# EAGLE board CT_schematic (EAGLE 7.6.0)

Size 100 x 80 mm. Coordinates in mm from the lower left corner, seen from the top.
Outline: 0,0 100,0 100,80 0,80 0,0
Copper layers (1*16): Top 0.035mm / dielectric 1.5mm / Bottom 0.035mm
Design rules "default": minimum track width 10mil, minimum drill 24mil, track to track 8mil, track to pad 8mil, pad to pad 8mil, via to via 8mil, smd to smd 8mil, copper to edge 40mil, drill to drill 8mil, minimum pad ring 10mil, minimum via ring 8mil, stop-mask expansion 4mil, vias tented up to drill 0mil, thermal gap 10mil

## Footprints (pad centres in the part's own frame; a part is rotated, then mirrored left to right if it is on the bottom)
C0603 = smd 0.8 x 0.8: 1 -0.762,0; 2 0.762,0
C0402 = smd 0.5 x 0.5: 1 -0.508,0; 2 0.508,0
C1210 = smd 1.2 x 2.5: 1 -1.524,0; 2 1.524,0
C1206 = smd 1.3 x 1.6: 1 -1.524,0; 2 1.524,0
L0603 = smd 0.8 x 0.8: 1 -0.762,0; 2 0.762,0
R0603 = smd 0.8 x 0.8: 1 -0.762,0; 2 0.762,0
UFQFPN20 = smd 0.35 x 0.3: 1 0.1,0; 5 0.1,2; 11 -2.7,2; 15 -2.7,0 | smd 0.7 x 0.3: 2 0,0.5; 3 0,1; 4 0,1.5; 12 -2.6,1.5; 13 -2.6,1; 14 -2.6,0.5 | smd 0.3 x 0.35: 6 -0.3,2.4; 10 -2.3,2.4; 16 -2.3,-0.4; 20 -0.3,-0.45 | smd 0.3 x 0.7: 7 -0.8,2.3; 17 -1.8,-0.3; 18 -1.3,-0.3; 19 -0.8,-0.3 | smd 0.3 x 0.8: 8 -1.3,2.3; 9 -1.8,2.3
SOIC-8 = smd 1.6 x 0.6: 1 -2.7,1.905 | smd 1.55 x 0.6: 2 -2.7,0.635; 3 -2.7,-0.635; 4 -2.7,-1.905; 5 2.7,-1.905; 6 2.7,-0.635; 7 2.7,0.635; 8 2.7,1.905
LGA14R35P5X6_200X200X100 = smd 0.35 x 0.15: 1 -0.8,0.525; 2 -0.8,0.175; 3 -0.8,-0.175; 4 -0.8,-0.525; 8 0.8,-0.525; 9 0.8,-0.175; 10 0.8,0.175; 11 0.8,0.525 | smd 0.15 x 0.35: 5 -0.35,-0.8; 6 0,-0.8; 7 0.35,-0.8; 12 0.35,0.8; 13 0,0.8; 14 -0.35,0.8
ASEK = smd 1.4 x 1: 1 -1.1,-0.8; 2 1.1,-0.8; 3 1.1,0.8; 4 -1.1,0.8
ASFL1 = smd 1.7 x 1.5: 1 -1.27,-1.1; 2 1.27,-1.1; 3 1.27,1.1; 4 -1.27,1.1
SOIC-8_EP = smd 1.6 x 0.533: 1 -2.921,1.905; 2 -2.921,0.635; 3 -2.921,-0.635; 4 -2.921,-1.905; 5 2.921,-1.905; 6 2.921,-0.635; 7 2.921,0.635; 8 2.921,1.905 | smd 2.54 x 3.302: EPAD 0,0 | drill 0.406 pad 0.406: P$1 -0.508,0.635; P$2 0.381,0.635; P$3 -0.508,-0.635; P$4 0.381,-0.635
DFN8_2X3MC = smd 0.813 x 0.305: 1 -1.398,0.75; 2 -1.398,0.25; 3 -1.398,-0.25; 4 -1.398,-0.75; 5 1.398,-0.75; 6 1.398,-0.25; 7 1.398,0.25; 8 1.398,0.75 | smd 1.753 x 1.549: 9 0,0
JST-2-SMD = smd 1 x 4.6: 1 -1,-3.7; 2 1,-3.7 | smd 1.6 x 3.4: NC1 -3.4,1.5; NC2 3.4,1.5
FCI_10118193-0001LF = smd 0.4 x 1.35: 1 -1.3,2.675; 2 -0.65,2.675; 3 0,2.675; 4 0.65,2.675; 5 1.3,2.675 | smd 1.6 x 1.4: 6 -3.2,2.45; 7 3.2,2.45 | smd 1.9 x 1.9: 8 -1.2,0; 9 1.2,0 | hole 0.5: -3.3,0; 3.3,0
SON-6 = smd 0.55 x 0.3: 1 -0.355,0.5 | smd 0.52 x 0.3: 2 -0.37,0; 3 -0.37,-0.5; 4 0.37,-0.5; 5 0.37,0; 6 0.37,0.5
SW_4-1437565-2 = smd 1.4 x 2.1: 1 -2.23,4.55; 2 -2.23,-4.55; 3 2.23,4.55; 4 2.23,-4.55
LGM67K-G1J2-24-Z = smd 0.8 x 1.4: A -2,0; C 0,0
NC7SZ125M5X = smd 1.3 x 0.7: 1 -1.3,0.95; 2 -1.3,0; 3 -1.3,-0.95; 4 1.3,-0.95; 5 1.3,0.95

## Placement (x,y rotation side)
C1  1e-07  [C0603]  -53.34,45.72 0 top  (outside the outline)
C2  1e-07  [C0603]  -57.15,45.72 0 top  (outside the outline)
C3  1e-07  [C0603]  -15.24,50.8 0 top  (outside the outline)
C4  1e-07  [C0603]  -19.05,50.8 0 top  (outside the outline)
C5  4.7e-06  [C0603]  -49.53,45.72 0 top  (outside the outline)
C6  1e-08  [C0603]  -22.86,50.8 0 top  (outside the outline)
C7  1e-06  [C0603]  -26.67,50.8 0 top  (outside the outline)
C8  1e-08  [C0402]  -19.05,55.88 0 top  (outside the outline)
C9  1e-07  [C0402]  -22.86,55.88 0 top  (outside the outline)
C10  1e-07  [C0402]  -26.67,55.88 0 top  (outside the outline)
C11  1e-08  [C0402]  -30.48,55.88 0 top  (outside the outline)
C12  1e-08  [C0402]  -34.29,55.88 0 top  (outside the outline)
C13  1e-05  [C1210]  -38.1,34.29 0 top  (outside the outline)
C14  1e-05  [C1210]  -44.45,34.29 0 top  (outside the outline)
C15  1e-05  [C1210]  -50.8,34.29 0 top  (outside the outline)
C16  1e-05  [C1210]  -57.15,34.29 0 top  (outside the outline)
C17  1e-07  [C0402]  -38.1,55.88 0 top  (outside the outline)
C18  1e-05  [C1206]  -16.51,40.64 0 top  (outside the outline)
C19  1e-05  [C1206]  -22.86,40.64 0 top  (outside the outline)
C20  1e-08  [C0402]  -41.91,55.88 0 top  (outside the outline)
F1  240.0  [L0603]  -30.48,50.8 0 top  (outside the outline)
R1  10000.0  [R0603]  -53.34,40.64 0 top  (outside the outline)
R2  1000.0  [R0603]  -34.29,50.8 0 top  (outside the outline)
R3  1600.5  [R0603]  -38.1,50.8 0 top  (outside the outline)
R4  4700.0  [R0603]  -41.91,50.8 0 top  (outside the outline)
R5  2200.0  [R0603]  -45.72,50.8 0 top  (outside the outline)
R6  2200.0  [R0603]  -49.53,50.8 0 top  (outside the outline)
R7  10000.0  [R0603]  -58.42,40.64 0 top  (outside the outline)
R8  10000.0  [R0603]  -15.24,45.72 0 top  (outside the outline)
R9  10000.0  [R0603]  -20.32,45.72 0 top  (outside the outline)
R10  10000.0  [R0603]  -25.4,45.72 0 top  (outside the outline)
R11  10000.0  [R0603]  -30.48,45.72 0 top  (outside the outline)
R12  4031.5447154472  [R0603]  -38.1,40.64 0 top  (outside the outline)
R13  2200.0  [R0603]  -53.34,50.8 0 top  (outside the outline)
R14  10000.0  [R0603]  -35.56,45.72 0 top  (outside the outline)
R15  10000.0  [R0603]  -40.64,45.72 0 top  (outside the outline)
R16  9100.0  [R0603]  -57.15,50.8 0 top  (outside the outline)
R17  680000.0  [R0603]  -43.18,40.64 0 top  (outside the outline)
R18  120000.0  [R0603]  -48.26,40.64 0 top  (outside the outline)
R19  2000.0  [R0603]  -15.24,55.88 0 top  (outside the outline)
R20  10000.0  [R0603]  -45.72,45.72 0 top  (outside the outline)
U1  STM32L011F4U3  [UFQFPN20]  -24.13,25.4 0 top  (outside the outline)
U2  AT25080B-SSHL-T  [SOIC-8]  -24.13,17.78 0 top  (outside the outline)
U3  BMC150  [LGA14R35P5X6_200X200X100]  -33.02,34.29 0 top  (outside the outline)
U4  ASEK-32.768KHz-ECST  [ASEK]  -45.72,26.67 0 top  (outside the outline)
U5  ASFL1-12MHZ-NCS  [ASFL1]  -41.91,16.51 0 top  (outside the outline)
U6  MIC5234YME  [SOIC-8_EP]  -53.34,25.4 0 top  (outside the outline)
U7  MCP73831T-2ACI/MC  [DFN8_2X3MC]  -50.8,54.61 0 top  (outside the outline)
U8  S2B-PH-SM4-TB(LF)(SN)  [JST-2-SMD]  -41.91,6.35 0 top  (outside the outline)
U9  10118193-0001LF  [FCI_10118193-0001LF]  -50.8,16.51 0 top  (outside the outline)
U10  TPS3895ADRYR  [SON-6]  -44.45,54.61 0 top  (outside the outline)
U11  4-1437565-2  [SW_4-1437565-2]  -27.94,6.35 0 top  (outside the outline)
U12  Q65110A2395  [LGM67K-G1J2-24-Z]  -17.78,34.29 0 top  (outside the outline)
U13  nc7sz125m5x  [NC7SZ125M5X]  -27.94,39.37 0 top  (outside the outline)

## Library data of the parts
C1-C20 F1 R1-R20 U1-U13 = circuit_tree

## Nets
CLK_U1_1: U1.1 U4.3
CLK_U1_5: U1.5 U5.3
GND: C1.2 C2.2 C3.2 C4.2 C5.2 C6.2 C7.2 C8.2 C9.2 C10.2 C11.2 C12.2 C13.2 C14.2 C15.2 C16.2 C17.2 C18.2 C19.2 C20.2 R2.2 R7.2 R13.2 R16.2 R18.2 R19.2 U1.12 U2.4 U3.1 U3.6 U3.7 U3.9 U4.2 U5.2 U6.7 U6.EPAD U7.6 U7.9 U8.2 U9.5 U9.6 U9.7 U9.8 U9.9 U10.2 U12.C U13.1 U13.3
INPUT_USBPOWER_5V: C18.1 R20.2 U7.1 U7.2 U9.1
NET_U1_3: R4.1 U1.3 U13.4
NET_U1_4: C6.1 C7.1 F1.1 U1.4
NET_U1_14: R5.1 U1.14 U3.11
NET_U1_15: R6.1 U1.15 U3.14
NET_U1_19: R3.1 U1.19 U12.A
NET_U1_20: R1.1 R7.1 U1.20 U11.3 U11.4
NET_U2_3: R8.1 U2.3
NET_U2_7: R10.1 U2.7
NET_U6_4: R12.2 R13.1 U6.4
NET_U7_5: R20.1 U7.5
NET_U7_8: R19.1 U7.8
NET_U10_1: R15.1 R16.1 U10.1
NET_U10_3: R17.2 R18.1 U10.3
NET_U10_4: R14.1 U10.4 U13.2
NET_U11_1: R2.1 U11.1 U11.2
PROC_SPI1_MISO: U1.9 U2.2
PROC_SPI1_MOSI: U1.10 U2.5
PROC_SPI1_NSS: R9.1 U1.7 U2.1
PROC_SPI1_SCK: U1.8 U2.6
VCC_S1_3V7: C13.1 C14.1 C19.1 U6.5 U6.8 U7.3 U7.4 U8.1
VCC_TIER1_3V3: C1.1 C2.1 C3.1 C4.1 C5.1 C8.1 C9.1 C10.1 C11.1 C12.1 C15.1 C16.1 C17.1 C20.1 F1.2 R1.2 R3.2 R4.2 R5.2 R6.2 R8.2 R9.2 R10.2 R11.1 R11.2 R12.1 R14.2 R15.2 R17.1 U1.13 U2.8 U3.8 U3.10 U3.12 U3.13 U4.4 U5.4 U6.1 U10.6 U13.5

## Tracks (layer width: path | path; a pad name or v marks a point on that pad's centre or on a via)
CLK_U1_1  (1 unrouted)
CLK_U1_5  (1 unrouted)
GND  (47 unrouted)
INPUT_USBPOWER_5V  (4 unrouted)
NET_U1_3  (2 unrouted)
NET_U1_4  (3 unrouted)
NET_U1_14  (2 unrouted)
NET_U1_15  (2 unrouted)
NET_U1_19  (2 unrouted)
NET_U1_20  (4 unrouted)
NET_U2_3  (1 unrouted)
NET_U2_7  (1 unrouted)
NET_U6_4  (2 unrouted)
NET_U7_5  (1 unrouted)
NET_U7_8  (1 unrouted)
NET_U10_1  (2 unrouted)
NET_U10_3  (2 unrouted)
NET_U10_4  (2 unrouted)
NET_U11_1  (2 unrouted)
PROC_SPI1_MISO  (1 unrouted)
PROC_SPI1_MOSI  (1 unrouted)
PROC_SPI1_NSS  (2 unrouted)
PROC_SPI1_SCK  (1 unrouted)
VCC_S1_3V7  (7 unrouted)
VCC_TIER1_3V3  (39 unrouted)